# Altium PCB ledstripes.PcbDoc
Units mil, origin at the board's own origin, x right, y up, seen from the top; angles counter-clockwise.
Board outline 1525 x 1400 mil, 2 copper layers (Top Layer, Bottom Layer), stack 65.792 mil thick; 39 components, 31 nets, 128 pads, 47 vias.
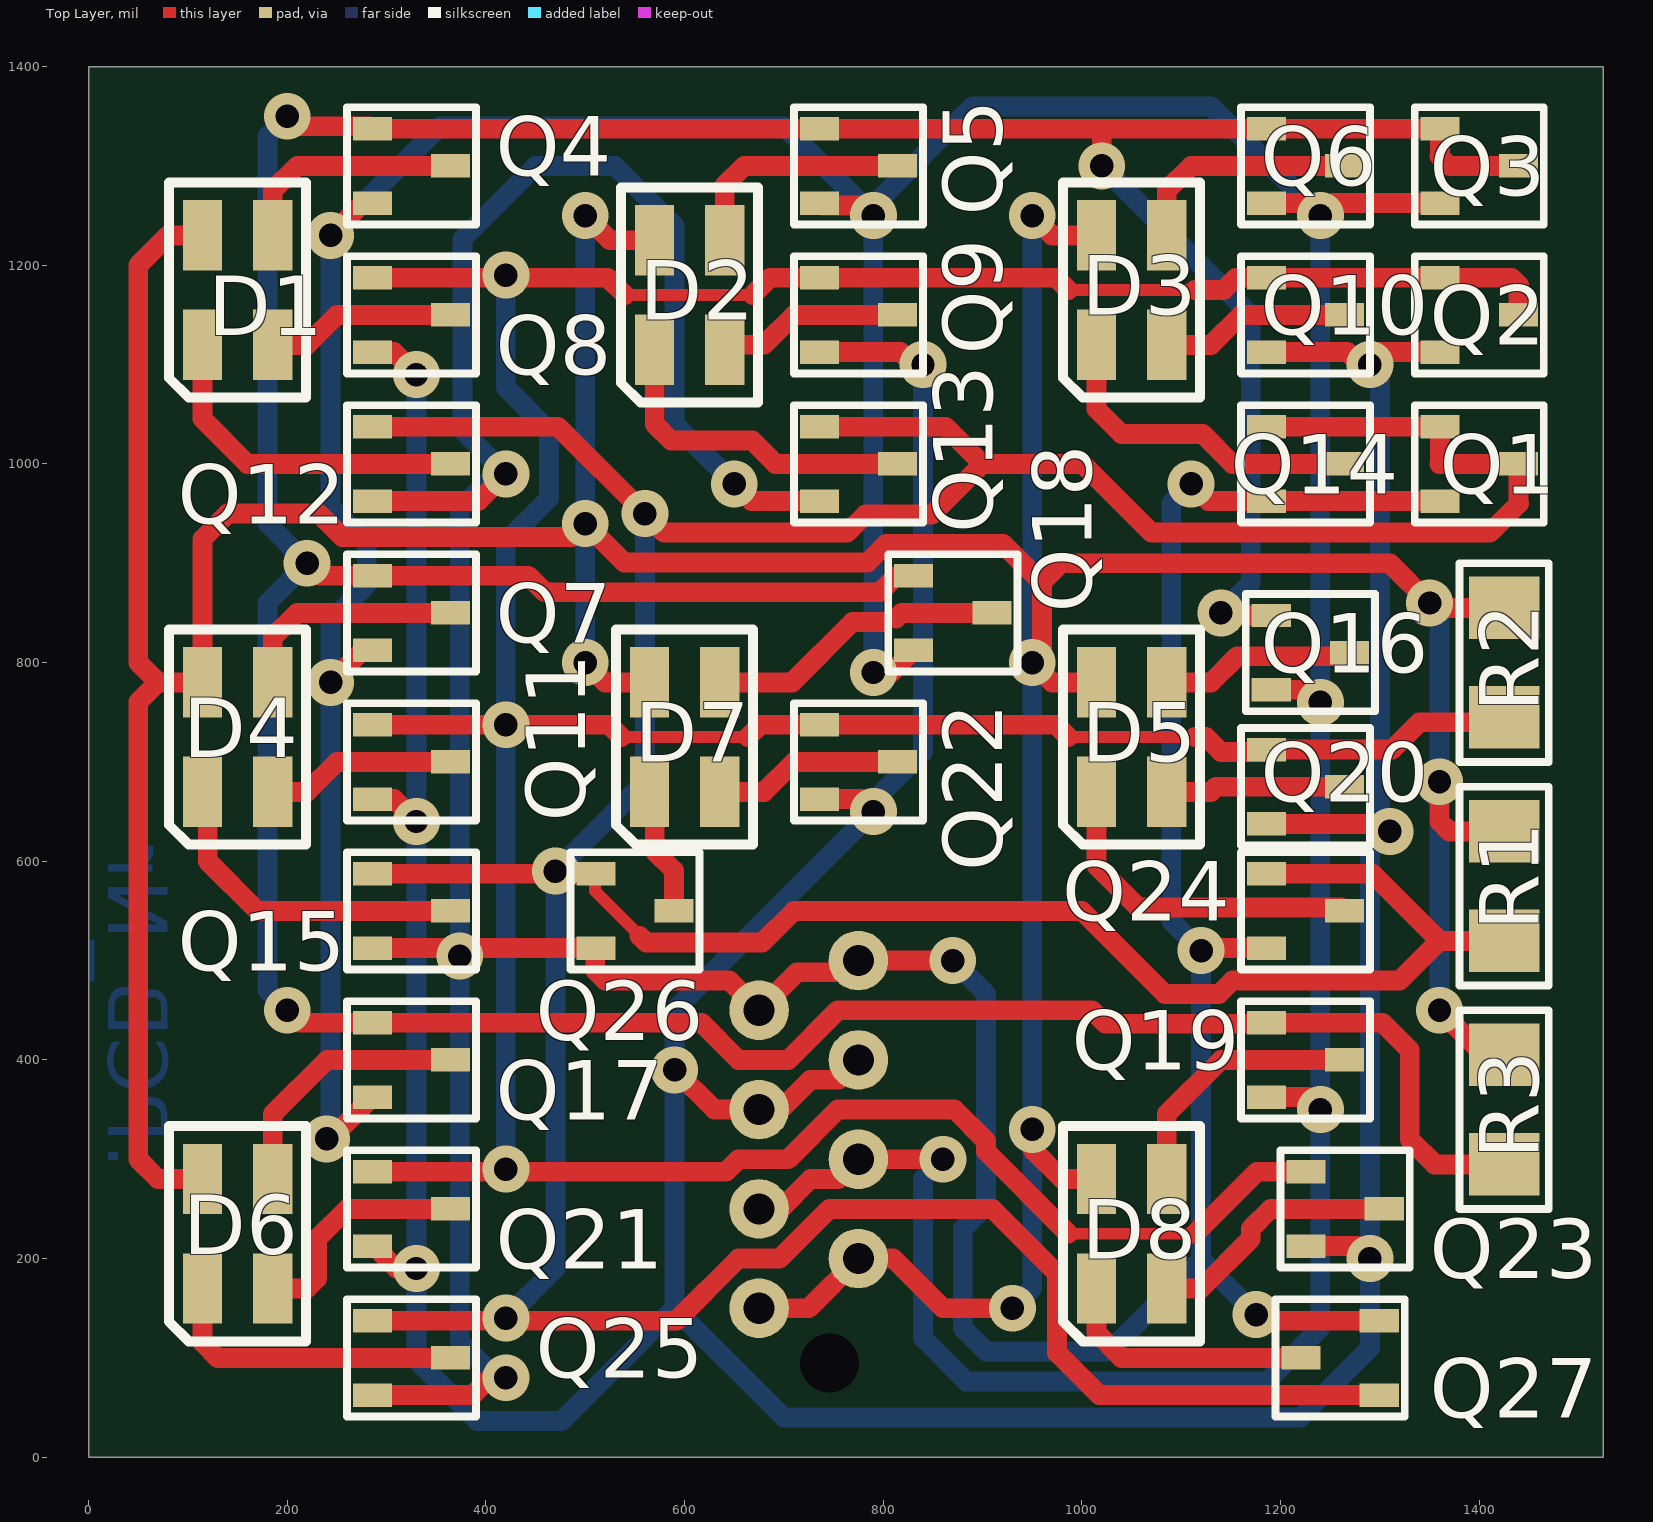
[diagram p0: Top Layer view]
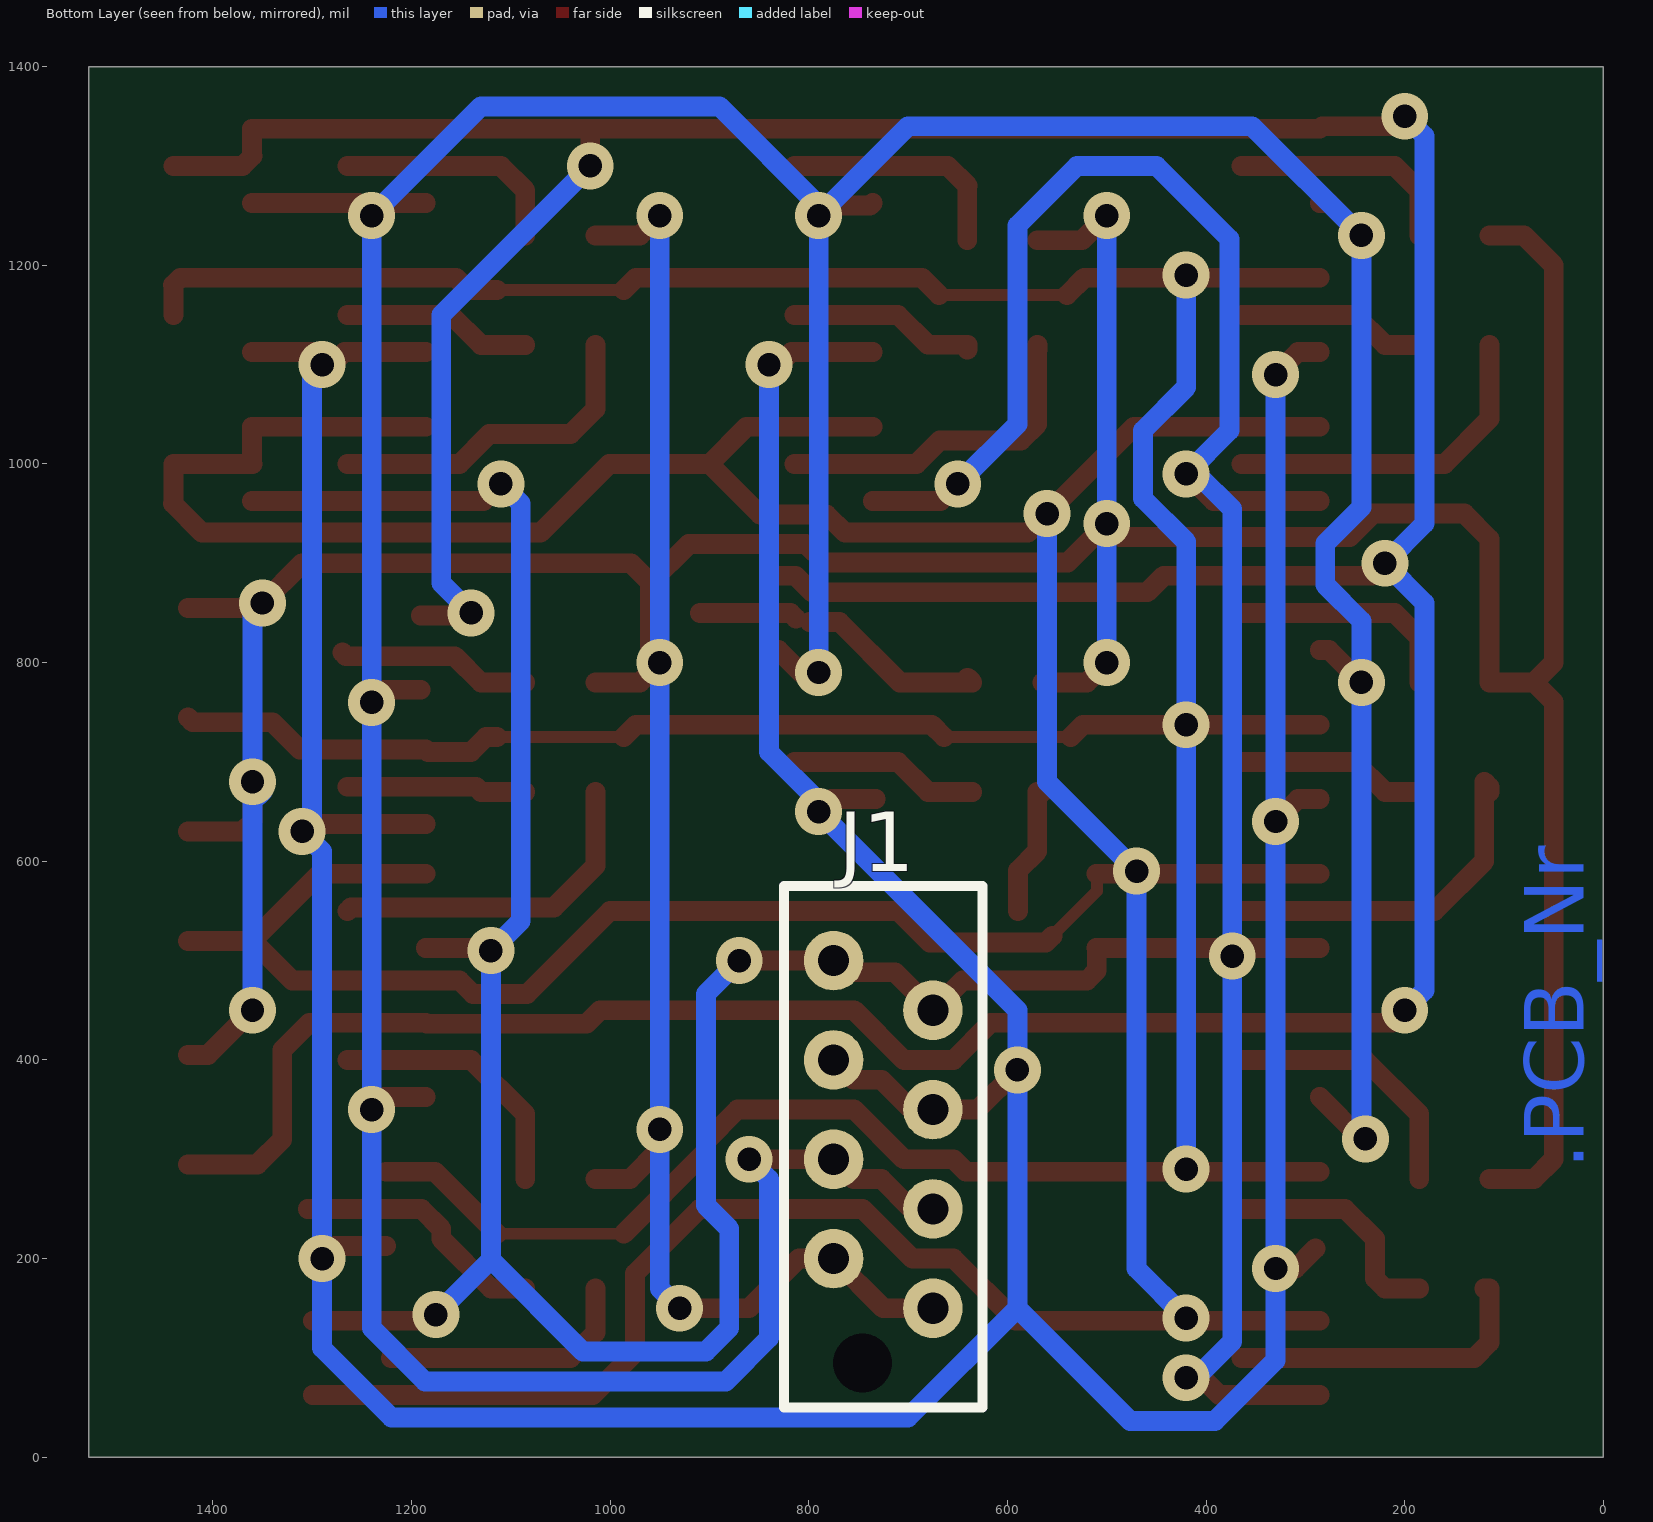
[diagram p1: Bottom Layer view, seen from below]
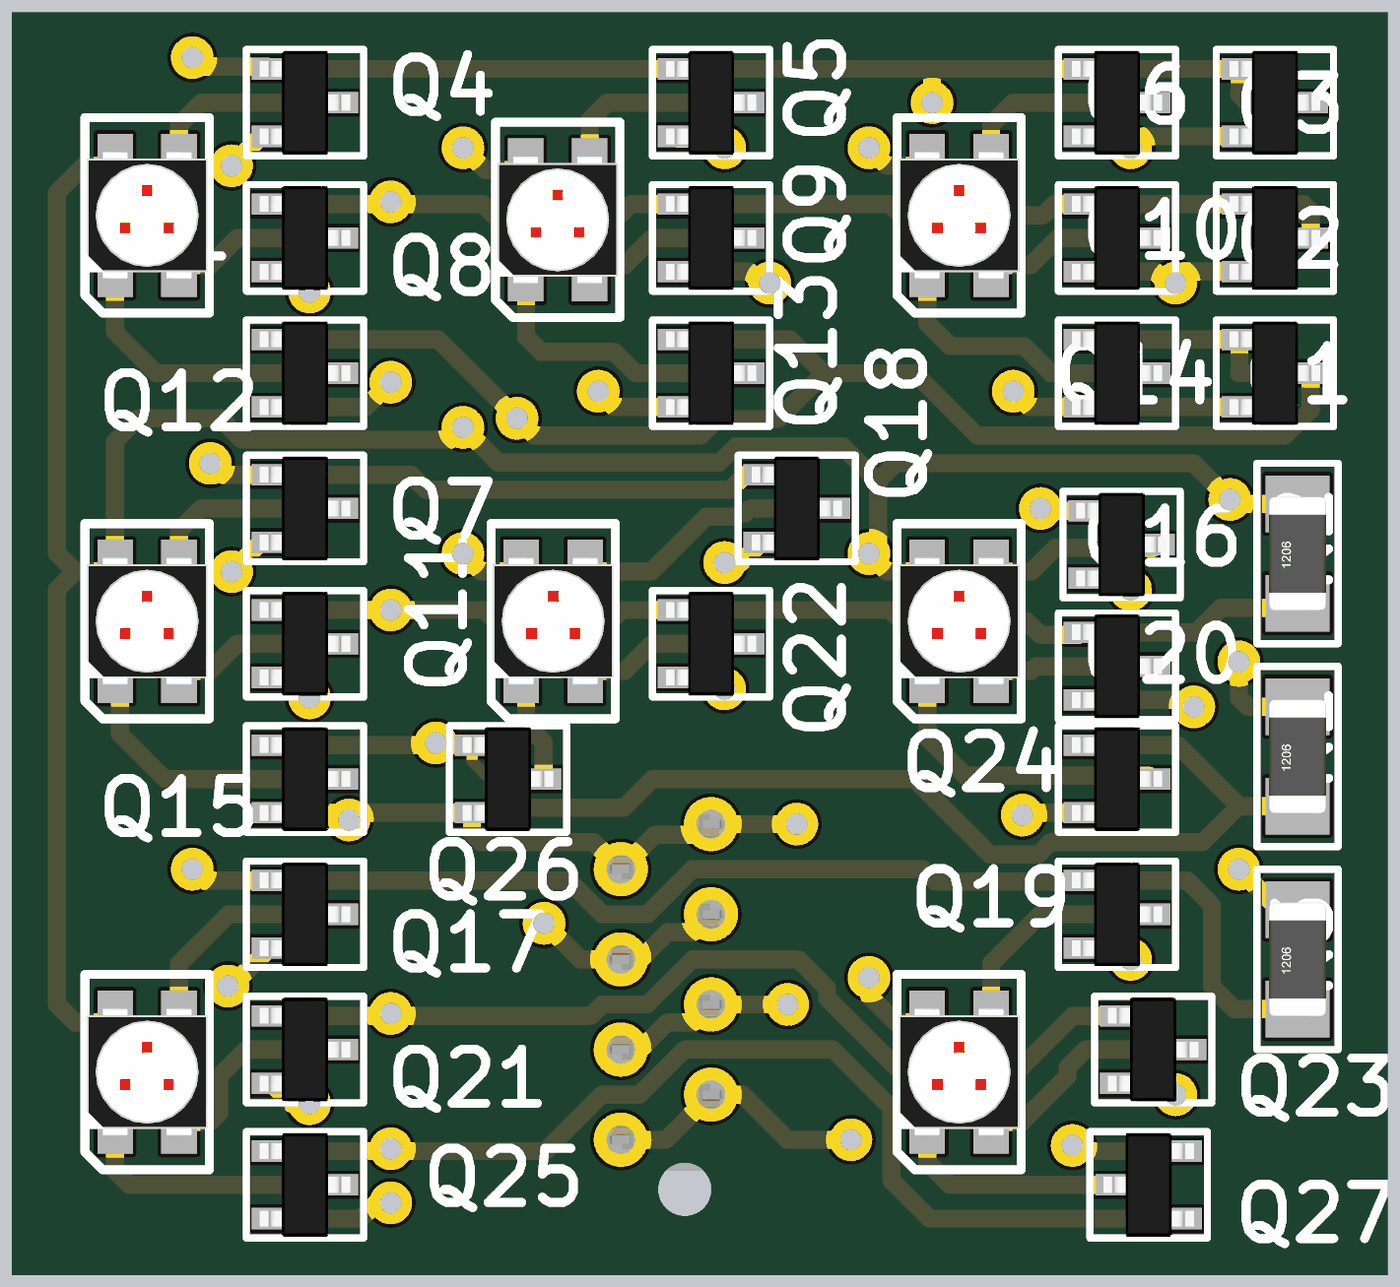
[diagram p2: 3D render of the assembled board from above, using the file's embedded part models]

## Layer stack, top to bottom
Top Layer: signal copper 1.4
Dielectric: core 62.9921, FR-4, Dk 4.8
Bottom Layer: signal copper 1.4

## Board outline
0,0 0,1400 1525,1400 1525,0

## Design rules (kind name [scope] priority, off if disabled: settings)
Clearance [All] p1: gap=10
HoleSize [All] p1: absolutevalues=TRUE maxlimit=118.11 minlimit=23.62 maxpercent=80.000 minpercent=20.000
MinimumAnnularRing [All] p1: minimumring=10
PolygonConnect [All] p1: connectstyle=Relief reliefconductorwidth=10 reliefentries=4 polygonreliefangle="90 Angle"
RoutingVias [All] p1: holewidth=23.62 width=47.24 viastyle="Through Hole" minholewidth=23.62 minwidth=47.24 maxholewidth=23.62 maxwidth=47.24
SilkscreenOverComponentPads [All] p1: minsilkscreentomaskgap=10
SolderMaskExpansion [All] p1: expansion=4
Width [All] p1: maxlimit=20 minlimit=10 preferedwidth=20
26 further rules are at their usual default settings.

## Components (designator, comment, footprint, x,y, rotation, side; value= is the part's Value field where it differs from the comment)
D1 "NECM325C" D_PLCC4 150,1175 r270 top
D2 "NECM325C" D_PLCC4 605,1170 r270 top
D3 "NECM325C" D_PLCC4 1050,1175 r270 top
D4 "NECM325C" D_PLCC4 150,725 r270 top
D5 "NECM325C" D_PLCC4 1050,725 r270 top
D6 "NECM325C" D_PLCC4 150,225 r270 top
D7 "NECM325C" D_PLCC4 600,725 r270 top
D8 "NECM325C" D_PLCC4 1050,225 r270 top
J1 "CNFLC08M_TBD" J_215079-8 675,150 r270 bottom
Q1 "BC847" SOT23 1400,1000 r0 top
Q2 "BC847" SOT23 1400,1150 r0 top
Q3 "BC847" SOT23 1400,1300 r0 top
Q4 "BC847" SOT23 325,1300 r0 top
Q5 "BC847" SOT23 775,1300 r0 top
Q6 "BC847" SOT23 1225,1300 r0 top
Q7 "BC847" SOT23 325,850 r0 top
Q8 "BC847" SOT23 325,1150 r0 top
Q9 "BC847" SOT23 775,1150 r0 top
Q10 "BC847" SOT23 1225,1150 r0 top
Q11 "BC847" SOT23 325,700 r0 top
Q12 "BC847" SOT23 325,1000 r0 top
Q13 "BC847" SOT23 775,1000 r0 top
Q14 "BC847" SOT23 1225,1000 r0 top
Q15 "BC847" SOT23 325,550 r0 top
Q16 "BC847" SOT23 1230,810 r0 top
Q17 "BC847" SOT23 325,400 r0 top
Q18 "BC847" SOT23 870,850 r0 top
Q19 "BC847" SOT23 1225,400 r0 top
Q20 "BC847" SOT23 1225,675 r0 top
Q21 "BC847" SOT23 325,250 r0 top
Q22 "BC847" SOT23 775,700 r0 top
Q23 "BC847" SOT23 1265,250 r0 top
Q24 "BC847" SOT23 1225,550 r0 top
Q25 "BC847" SOT23 325,100 r0 top
Q26 "BC847" SOT23 550,550 r0 top
Q27 "BC847" SOT23 1260,100 r180 top
R1 "220E/1206" R_1206 1425,575 r90 top
R2 "430E/1206" R_1206 1425,800 r90 top
R3 "430E/1206" R_1206 1425,350 r90 top

## Footprints (in the part's own frame and the unit in brackets; to place one, negate y for a bottom-side part, rotate by r counter-clockwise, add the part's x,y. Pads: shape width x height; smd on the part's side, far side on the other; paste and mask are expansions set on the pad)
D_PLCC4 [mm] "RGB-LED"
  rect 1.8x1 smd: 1(1.4,-0.9) 2(1.4,0.9) 3(-1.4,0.9) 4(-1.4,-0.9)
  silkscreen extent -2.75,-1.75 2.75,1.75, body extent -1.8,-1.7 1.8,1.7, height 2
J_215079-8 [mil] "MicroMatch 8p through hole vertical"
  round 0 hole 59.06 unplated mask+29.53: 0(55.12,-70.87)
  round 60 hole 31.5: 1(0,0) 2(-50,-100) 3(-100,0) 4(-150,-100) 5(-200,0) 6(-250,-100) 7(-300,0) 8(-350,-100)
  silkscreen extent -425,-150 100,50, body extent -413,-148 63,48, height 157
R_1206 [mm] "Chip Resistor; Body 3.2 x 1.6 mm (LxW typ)"
  rect 1.6x1.8 smd: 1(-1.4,0) 2(1.4,0)
  silkscreen extent -2.54,-1.14 2.54,1.14, body extent -1.6,-0.8 1.6,0.8, height 1
SOT23 [mm] "SOT23, 3-Leads, Body 2.9x1.3mm, Pitch 0.95mm, Lead Span 2.3mm, IPC High Density"
  rect 1x0.6 smd: 1(-1,0.95) 2(-1,-0.95) 3(1,0)
  silkscreen extent -1.65,-1.5 1.65,1.5, body extent -1.27,-1.46 1.27,1.46, height 0.99

## Part data
J1: library part CNFLC08F_TBD, "*"
Q1 Q2 Q3 Q4 Q5 Q6 Q7 Q8 Q9 Q10 Q11 Q12 Q13 Q14 Q15 Q16 Q17 Q18 Q19 Q20 Q21 Q22 Q23 Q24 Q25 Q26 Q27: "Amplifier Transistor NPN Silicon"
R1: library part YRES220_1206, "Resistor"
R2 R3: library part YRES430E_TBD, "Resistor"

## Via types
v1: diameter 47.24, hole 23.62, Top Layer to Bottom Layer, 47 vias

## Nets (pads, with @x,y where several pads share a name; then routed paths per layer and width w, separated by ;. In a path a pad name is that pad's centre, name@x,y a point inside that pad or via, vN(x,y) a via of type N, cw(c..) or ccw(c..) an arc to the next point about the centre after c; other vN are vias at no path point)
+5V: D1.4 D2.4 D3.4 D4.4 D5.4 D6.4 D7.4 D8.4 J1.1 J1.2 R1.2 R2.2 R3.2 | length 5608.5
  Top Layer w20: D6.4 70.12,280.12 70,280 50,300 50,760.24 69.88,780.12 ; D1.4 80.12,1230.12 50,1200 50,800 69.88,780.12 ; v1(500,800) 519.88,780.12 D7.4 ; v1(500,1250) 524.88,1225.12 D2.4 ; J1.1 725,150 J1.2 810,200 860,150 v1(930,150) ; v1(950,330) 950,310 980,280 980.12,280.12 D8.4 ; v1(950,1250) 969.88,1230.12 D3.4 ; 959.48,880.52 978.96,900 1310,900 v1(1350,860) 1354.88,855.12 R2.2 ; D5.4 969.88,780.12 v1(950,800) 960,810 960,880 920.79,919.21 802.66,919.21 784.24,900.79 539.21,900.79 v1(500,940) 486.38,926.38 255.31,926.38 231.69,950 140,950 114.57,924.57 D4.4 69.88,780.12 ; v1(1360,450) 1404.88,405.12 R3.2 ; v1(1360,680) 1360,640 1369.88,630.12 R1.2
  Bottom Layer w20: v1(500,800) v1(500,940) v1(500,1250) ; v1(930,150) 950,170 v1(950,330) v1(950,800) v1(950,1250) ; v1(1350,860) 1360,850 v1(1360,680) 1350,670 1360,660 v1(1360,450)
NetD1_1: D1.1 Q12.3 | length 343.1
  Top Layer w20: D1.1 114.57,1045.43 160,1000 Q12.3
NetD1_2: D1.2 Q8.3 | length 191.4
  Top Layer w20: D1.2 219.88,1119.88 250,1150 Q8.3
NetD1_3: D1.3 Q4.3 | length 234.4
  Top Layer w20: D1.3 185.43,1275.43 210,1300 Q4.3
NetD2_1: D2.1 Q13.3 | length 346.2
  Top Layer w20: D2.1 569.57,1119.57 570,1120 570,1040 586.38,1023.62 668.07,1023.62 691.69,1000 Q13.3
NetD2_2: D2.2 Q9.3 | length 192.1
  Top Layer w20: D2.2 640,1115.31 640,1120 680,1120 710,1150 Q9.3
NetD2_3: D2.3 Q5.3 | length 237.7
  Top Layer w20: D2.3 640.43,1279.57 640,1280 660,1300 Q5.3
NetD3_1: D3.1 Q14.3 | length 337.2
  Top Layer w20: D3.1 1014.57,1055.43 1040,1030 1121.69,1030 1151.69,1000 Q14.3
NetD3_2: D3.2 Q10.3 | length 191.4
  Top Layer w20: D3.2 1129.88,1119.88 1160,1150 Q10.3
NetD3_3: D3.3 Q6.3 | length 234.4
  Top Layer w20: D3.3 1085.43,1275.43 1110,1300 Q6.3
NetD4_1: D4.1 Q15.3 | length 357.4
  Top Layer w20: D4.1 114.57,674.57 120,680 120,600 170,550 Q15.3
NetD4_2: D4.2 Q11.3 | length 191.4
  Top Layer w20: D4.2 219.88,669.88 250,700 Q11.3
NetD4_3: D4.3 Q7.3 | length 234.4
  Top Layer w20: D4.3 185.43,825.43 210,850 Q7.3
NetD5_1: D5.1 Q24.3 | length 343.1
  Top Layer w20: D5.1 1014.57,595.43 1056.38,553.62 1260.75,553.62 Q24.3
NetD5_2: D5.2 Q20.3 | length 181.1
  Top Layer w20: D5.2 1129.88,669.88 1135,675 Q20.3
NetD5_3: D5.3 Q16.3 | length 196.4
  Top Layer w20: D5.3 1085.55,780 1130,780 1156.38,806.38 1265.75,806.38 Q16.3
NetD6_1: D6.1 Q25.3 | length 316.1
  Top Layer w20: D6.1@120,170 114.69,170 D6.1 114.57,115.43 130,100 Q25.3
NetD6_2: D6.2 Q21.3 | length 235.6
  Top Layer w20: D6.2 219.88,169.88 230,180 230,220 260,250 Q21.3
NetD6_3: D6.3 Q17.3 | length 266.9
  Top Layer w20: D6.3 185.43,345.43 240,400 Q17.3
NetD7_1: D7.1 Q26.3 | length 133.5
  Top Layer w20: D7.1 564.69,670 570,670 570,610 589.37,590.63 Q26.3
NetD7_2: D7.2 Q22.3 | length 191.4
  Top Layer w20: D7.2 679.88,669.88 710,700 Q22.3
NetD7_3: D7.3 Q18.3 | length 295.5
  Top Layer w12: 799.04,840.79 799.21,840.79 800,840
  Top Layer w20: D7.3@640,784.68 D7.3 708.43,780.12 769.1,840.79 799.04,840.79 ; 812.71,844.41 818.3,850 Q18.3
NetD8_1: D8.1 Q27.3 | length 261
  Top Layer w20: D8.1 1014.57,125.43 1040,100 Q27.3
NetD8_2: D8.2 Q23.3 | length 258
  Top Layer w20: D8.2 1119.88,169.88 1170,220 1170,230 1190,250 Q23.3
NetD8_3: D8.3 Q19.3 | length 266.9
  Top Layer w20: D8.3 1085.43,345.43 1140,400 Q19.3
NetJ1_3: J1.3 J1.4 Q3.2 Q4.2 Q5.2 Q6.2 Q7.2 Q16.2 Q17.2 Q18.2 Q19.2 | length 5115.6
  Top Layer w20: v1(239.59,320.41) 243.44,320.41 Q17.2 ; v1(243.62,780) 276.22,812.6 Q7.2 ; v1(243.62,1230) 276.22,1262.6 Q4.2 ; J1.3 696.72,250 726.72,280 755,280 J1.4 v1(860,300) ; Q5.2 738.23,1260 780,1260 v1(790,1250) ; v1(790,790) 808.03,790 Q18.2 ; Q19.2 1227.4,362.6 v1(1240,350) ; Q6.2 1227.4,1262.6 v1(1240,1250) 1252.6,1262.6 Q3.2 ; Q16.2 1227.4,772.6 v1(1240,760)
  Bottom Layer w20: v1(239.59,320.41) 243.62,324.44 v1(243.62,780) 243.62,841.93 280,878.31 280,920 243.62,956.38 v1(243.62,1230) 353.62,1340 700,1340 v1(790,1250) ; v1(790,790) v1(790,1250) ; v1(860,300) 840,280 840,120 883.62,76.38 1186.38,76.38 1240,130 v1(1240,350) v1(1240,760) v1(1240,1250) 1130,1360 890,1360 790,1260 v1(790,1250)
NetJ1_5: J1.5 J1.6 Q2.2 Q8.2 Q9.2 Q10.2 Q11.2 Q20.2 Q21.2 Q22.2 Q23.2 | length 5111.3
  Top Layer w20: Q11.2 307.4,662.6 v1(330,640) ; Q8.2 307.4,1112.6 v1(330,1090) ; Q21.2@290,210 310,190 v1(330,190) ; v1(590,390) 630,350 J1.5 696.72,350 726.72,380 755,380 J1.6 ; Q22.2@732.6,662.6 Q22.2 777.4,662.6 v1(790,650) ; Q9.2 817.4,1112.6 830,1100 v1(840,1100) ; Q20.2 1302.4,637.6 v1(1310,630) ; Q10.2 1267.4,1112.6 v1@1280,1100 ; Q23.2 1277.4,212.6 v1(1290,200) ; v1(1290,1100) v1@1280,1100 ; Q2.2 1292.6,1112.6 v1@1280,1100
  Bottom Layer w20: v1(330,1090) v1(330,640) v1(330,190) 330,97.57 391.2,36.38 476.38,36.38 590,150 ; v1(840,1100) 840,710 790,660 v1(790,650) 590,450 v1(590,390) 590,150 ; v1@1283.62,1106.38 v1(1290,1100) 1300,1090 1300,640 v1(1310,630) 1290,610 v1(1290,200) 1290,110 1220,40 700,40 590,150
NetJ1_7: J1.7 J1.8 Q1.2 Q12.2 Q13.2 Q14.2 Q15.2 Q24.2 Q25.2 Q26.2 Q27.2 | length 4813.9
  Top Layer w20: Q25.2 386.75,62.6 404.15,80 v1(420,80) ; Q15.2 365.59,512.6 v1(373.62,504.57) 381.65,512.6 Q26.2 510,511.97 510,490 520,480 645,480 J1.7 713.19,488.19 763.19,488.19 J1.8 v1(870,500) ; Q12.2 392.6,962.6 v1(420,990) ; v1(650,980) 667.4,962.6 Q13.2 ; v1(1110,980) 1127.4,962.6 Q14.2 Q1.2 ; v1(1120,510) 1122.6,512.6 Q24.2 ; v1(1175.31,143.62) 1181.53,137.4 Q27.2
  Bottom Layer w20: v1(420,80) 410,80 373.62,116.38 v1(373.62,504.57) 373.62,954.57 409.06,990 v1(420,990) 376.38,1033.62 376.38,1226.38 450,1300 530,1300 590,1240 590,1040 v1(650,980) ; v1(870,500) 903.62,466.38 903.62,253.62 880,230 880,130 903.62,106.38 1027.44,106.38 1120,198.93 ; v1(1110,980) 1090,960 1090,540 v1(1120,510) 1120,198.93 ; v1(1175.31,143.62) 1120,198.93
NetQ1_1: Q1.1 Q1.3 Q12.1 Q13.1 Q14.1 Q15.1 Q24.1 Q25.1 Q26.1 Q27.1 R1.1 | length 5288.5
  Top Layer w12: Q26.1 510,586.77 510,570 554.79,525.21 554.79,524.79
  Top Layer w20: Q25.1 591.69,137.4 654.29,200 695.71,200 745.71,250 910,250 974.88,185.12 974.88,105.12 1017.4,62.6 Q27.1 ; Q15.1 v1@467.4,587.4 ; Q12.1 472.6,1037.4 v1(560,950) 579.21,930.79 763.6,930.79 782.02,949.21 849.21,949.21 900,1000 ; v1(470,590) v1@467.4,587.4 ; Q26.1 v1@467.4,587.4 ; 554.79,524.79 561.4,518.19 678.19,518.19 710,550 1000,550 1083.62,466.38 1138.07,466.38 1151.69,480 1320,480 1359.88,519.88 1360.12,519.88 ; Q13.1 862.6,1037.4 900,1000 ; Q24.1 1292.6,587.4 1360.12,519.88 ; Q14.1 Q1.1 1360.63,1000.63 1360,1000 Q1.3 1439.37,960.63 1440,960 1410.79,930.79 1070,930.79 1000.79,1000 900,1000 ; R1.1 1360.12,519.88
  Bottom Layer w20: v1(420,140) 470,190 v1(470,590) 560,680 v1(560,950)
NetQ2_1: Q2.1 Q2.3 Q8.1 Q9.1 Q10.1 Q11.1 Q20.1 Q21.1 Q22.1 Q23.1 R2.1 | length 4373.6
  Top Layer w12: 536.28,725 663.72,725 ; 540,1170 668.72,1170 ; 986.28,225 1113.72,225 ; 986.28,725 1113.72,725 ; 986.28,1175 1113.72,1175
  Top Layer w20: Q21.1 641.69,287.4 654.29,300 704.29,300 754.29,350 871.69,350 903.62,318.07 903.62,307.66 986.28,225 ; Q11.1 v1(420,737.4) 523.88,737.4 536.28,725 ; Q8.1 522.6,1187.4 540,1170 ; 663.72,725 676.12,737.4 Q22.1 973.88,737.4 986.28,725 ; 668.72,1170 686.12,1187.4 Q9.1 973.88,1187.4 986.28,1175 ; 1113.72,225 1176.12,287.4 Q23.1 ; 1113.72,725 1125,725 1140,710 1183.23,710 Q20.1 1312.4,712.4 1340,740 1420.12,740 R2.1 ; 1113.72,1175 1142.57,1175 1154.98,1187.4 Q10.1 Q2.1 1432.6,1187.4 1440,1180 1439.37,1179.37 Q2.3
  Bottom Layer w20: v1(420,290) v1(420,737.4) 420,921.69 463.62,965.31 463.62,1033.62 420,1077.24 v1(420,1190)
NetQ3_1: Q3.1 Q3.3 Q4.1 Q5.1 Q6.1 Q7.1 Q16.1 Q17.1 Q18.1 Q19.1 R3.1 | length 4854.9
  Top Layer w20: v1(200,450) 212.6,437.4 Q17.1 616.89,437.4 654.29,400 704.29,400 754.29,450 1010,450 1023.62,436.38 1184.61,436.38 Q19.1 1302.6,437.4 1330,410 1330,320 1355.12,294.88 R3.1 ; v1(200,1350) 210,1340 283.03,1340 Q4.1 Q5.1 1020,1337.4 ; v1(220,900) 232.6,887.4 Q7.1 442.6,887.4 459.21,870.79 796.66,870.79 813.28,887.4 Q18.1 ; v1@1031.1,1291.1 1028.9,1291.1 v1(1020,1300) 1020,1337.4 ; v1(1140,850) 1142.6,847.4 Q16.1 ; Q3.3 1370,1300 1360,1310 1360.63,1310.63 Q3.1 Q6.1 1020,1337.4
  Bottom Layer w20: v1(200,450) 180,470 180,860 v1(220,900) 180,940 180,1330 v1(200,1350) ; v1@1030,1290 1170,1150 1170,880 v1(1140,850)
pads on no net: J1.0

## Other copper
Bottom Layer:
  text ".PCB_Nr" at 20,290 h60 r270

## Silkscreen, mask and mechanical layers (free items; w line width, h text height)
PcbOutline:
  the board outline again, w10
Mechanical 16:
  drawing of 4360 lines, arcs and shapes, not listed
  text "A" at 3925,2575 h70 r90
  text "D" at -1725,2525 h70 r270
  text "C" at 150,2525 h70 r270
  text "B" at 1950,2525 h70 r270
  text "2" at -2575,1200 h70 r90
  text "2" at 4825,1200 h70 r90
  text "1" at -2575,-1650 h70 r90
  text "1" at 4825,-1650 h70 r90
  text "ENGINEER:" at 240,-1793 h45
  text "TITLE:" at 1740,-1793 h45
  text ".ProjectName" at 2025,-2053 h98.43
  text "PCB DESIGNER:" at 240,-2088 h45
  text ".DrawnByX" at 800,-2208 h98.43
  text "DATE:" at 240,-2393 h45
  text "PART NO.:" at 1740,-2393 h45
  text "REV:" at 3840,-2393 h45
  text ".PRINT_DATE" at 290,-2513 h70
  text ".RevisionNR" at 3878,-2568 h98.43
  text "FILE NAME:" at 240,-2693 h45
  text "DWG NO:" at 1740,-2693 h45
  text "SCALE:" at 3840,-2693 h45
  text ".PCB_FILE_NAME_NO_PATH" at 290,-2813 h70
  text ".PCB_Nr" at 2050,-2825 h98.43
  text "D" at -1843,-3019 h70 r270
  text "C" at 47,-3019 h70 r270
  text "B" at 1957,-3019 h70 r270
  text "A" at 3925,-3025 h70 r90
Drill Drawing:
  text ".Legend" at 1625,100 h60
Mechanical 17:
  drawing of 4360 lines, arcs and shapes, not listed
  text "A" at -1745,2575 h70 r270
  text "B" at 230,2525 h70 r90
  text "C" at 2030,2525 h70 r90
  text "D" at 3905,2525 h70 r90
  text "2" at -2645,1200 h70 r270
  text "2" at 4755,1200 h70 r270
  text "1" at -2645,-1650 h70 r270
  text "1" at 4755,-1650 h70 r270
  text "TITLE:" at 440,-1793 h45
  text "ENGINEER:" at 1940,-1793 h45
  text ".ProjectName" at 155,-2053 h98.43
  text "PCB DESIGNER:" at 1940,-2088 h45
  text "REV:" at -1660,-2393 h45
  text "PART NO.:" at 440,-2393 h45
  text "DATE:" at 1940,-2393 h45
  text ".PRINT_DATE" at 1890,-2513 h70
  text ".RevisionNR" at -1698,-2568 h98.43
  text "SCALE:" at -1660,-2693 h45
  text "DWG NO:" at 440,-2693 h45
  text "FILE NAME:" at 1940,-2693 h45
  text ".PCB_FILE_NAME_NO_PATH" at 1890,-2813 h70
  text ".PCB_Nr" at 130,-2825 h98.43
  text "B" at 223,-3019 h70 r90
  text "C" at 2133,-3019 h70 r90
  text "D" at 4023,-3019 h70 r90
  text "A" at -1745,-3025 h70 r270

## Dimensions
0,1400 to 1525,1400 on Measures
0,1400 to 0,0 on Measures